# Altium PCB PCB1.PcbDoc (part 3 of 4)
Units mil, origin at the board's own origin, x right, y up, seen from the top; angles counter-clockwise.
Board outline 6000 x 4000 mil, 2 copper layers (Top Layer, Bottom Layer); 7 components, 0 nets, 14 pads, 0 vias.
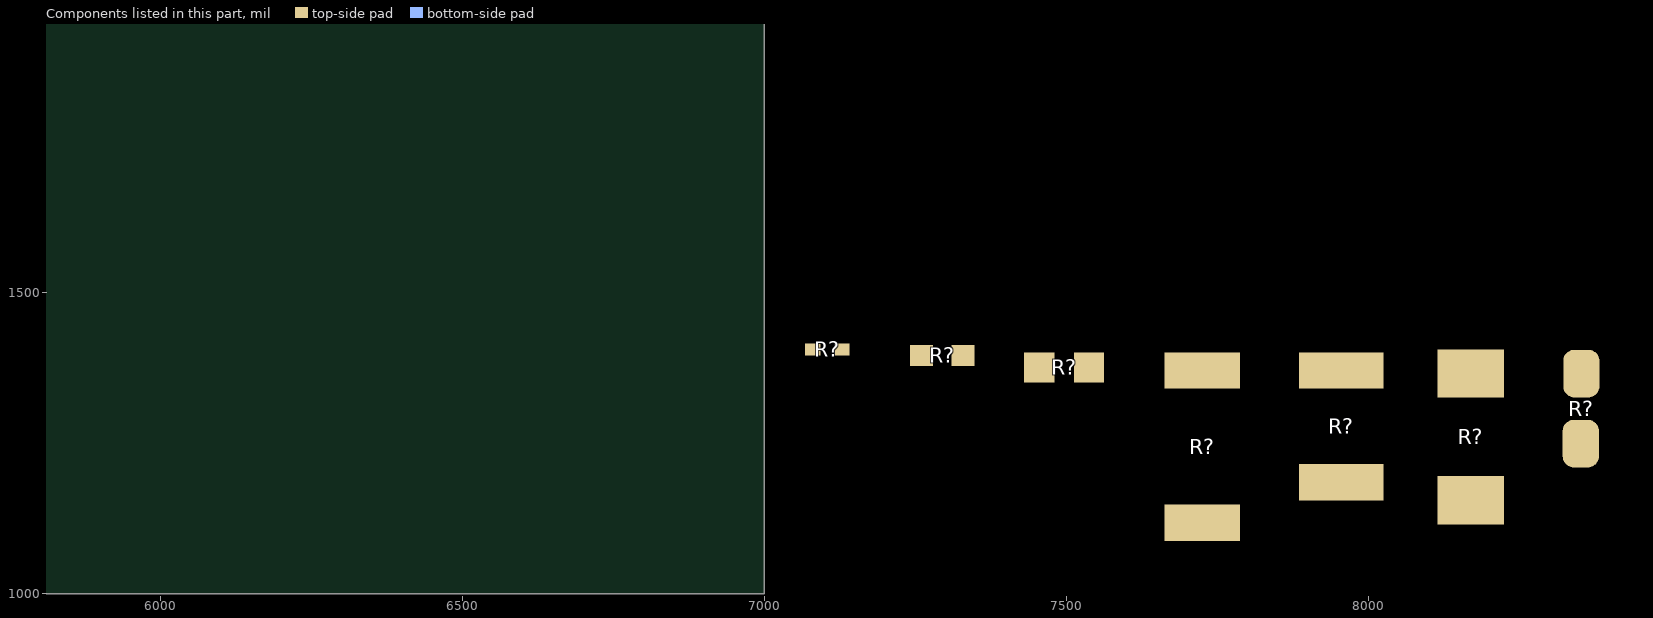
[diagram p3: the components of this part, seen from the top]

## Nets (pads, with @x,y where several pads share a name; then routed paths per layer and width w, separated by ;. In a path a pad name is that pad's centre, name@x,y a point inside that pad or via, vN(x,y) a via of type N, cw(c..) or ccw(c..) an arc to the next point about the centre after c; other vN are vias at no path point) (continued)
copper on no net: (continued)
  Top Layer w1: 6026,1578 6045,1578 ; 6026,1688 6045,1688 ; 6026,1818 6031,1818 ; 6026,1830 6040,1830 ; 6026,1875 6040,1875 ; 6027,1432 6041,1432 ; 6027,1489 6032,1489 ; 6027,1495 6176,1495 ; 6027,1579 6046,1579 ; 6027,1687 6046,1687 ; 6027,1812 6177,1812 ; 6027,1829 6038,1829 ; 6028,1580 6047,1580 ; 6028,1686 6047,1686 ; 6028,1853 6038,1853 ; 6028,1868 6034,1868 ; 6029,1439 6034,1439 ; 6029,1488 6034,1488 ; 6029,1494 6174,1494 ; 6029,1581 6048,1581 ; 6029,1685 6048,1685 ; 6029,1813 6175,1813 ; 6029,1819 6033,1819 ; 6029,1876 6044,1876 ; 6030,1431 6046,1431 ; 6030,1582 6049,1582 ; 6030,1684 6049,1684 ; 6030,1828 6034,1828 ; 6030,1854 6036,1854 ; 6031,1583 6050,1583 ; 6031,1683 6050,1683 ; 6031,1814 6172,1814 ; 6031,1820 6036,1820 ; 6031,1869 6037,1869 ; 6032,1438 6037,1438 ; 6032,1487 6037,1487 ; 6032,1493 6172,1493 ; 6032,1584 6051,1584 ; 6032,1682 6051,1682 ; 6032,1877 6049,1877 ; 6033,1430 6049,1430 ; 6033,1585 6052,1585 ; 6033,1681 6052,1681 ; 6033,1815 6170,1815 ; 6034,1486 6039,1486 ; 6034,1492 6170,1492 ; 6034,1586 6053,1586 ; 6034,1680 6053,1680 ; 6034,1821 6039,1821 ; 6034,1870 6041,1870 ; 6035,1587 6054,1587 ; 6035,1679 6054,1679 ; 6035,1850 6042,1850 ; 6036,1429 6055,1429 ; 6036,1437 6041,1437 ; 6036,1588 6055,1588 ; 6036,1661 6072,1661 ; 6036,1662 6071,1662 ; 6036,1678 6055,1678 ; 6036,1816 6168,1816 ; 6036,1822 6041,1822 ; 6036,1832 6043,1832 ; 6036,1878 6052,1878 ; 6037,1485 6042,1485 ; 6037,1491 6167,1491 ; 6037,1589 6056,1589 ; 6037,1663 6070,1663 ; 6037,1677 6056,1677 ; 6037,1848 6043,1848 ; 6037,1849 6043,1849 ; 6037,1871 6044,1871 ; 6038,1436 6044,1436 ; 6038,1590 6057,1590 ; 6038,1664 6069,1664 ; 6038,1676 6057,1676 ; 6038,1833 6043,1833 ; 6038,1847 6044,1847 ; 6039,1484 6045,1484 ; 6039,1490 6165,1490 ; 6039,1591 6058,1591 ; 6039,1665 6068,1665 ; 6039,1675 6058,1675 ; 6039,1817 6165,1817 ; 6039,1823 6044,1823 ; 6039,1834 6044,1834 ; 6039,1846 6044,1846 ; 6039,1879 6058,1879 ; 6040,1592 6059,1592 ; 6040,1666 6067,1666 ; 6040,1674 6059,1674 ; 6040,1835 6044,1835 ; 6040,1843 6045,1843 ; 6040,1844 6045,1844 ; 6040,1845 6044,1845 ; 6041,1428 6058,1428 ; 6041,1593 6060,1593 ; 6041,1667 6066,1667 ; 6041,1673 6060,1673 ; 6041,1818 6163,1818 ; 6041,1824 6047,1824 ; 6041,1836 6045,1836 ; 6041,1837 6045,1837 ; 6041,1838 6045,1838 ; 6041,1839 6046,1839 ; 6041,1840 6045,1840 ; 6041,1841 6045,1841 ; 6041,1842 6045,1842 ; 6041,1872 6048,1872 ; 6042,1483 6048,1483 ; 6042,1489 6162,1489 ; 6042,1594 6061,1594 ; 6042,1672 6061,1672 ; 6043,1435 6049,1435 ; 6043,1595 6062,1595 ; 6043,1668 6065,1668 ; 6043,1669 6064,1669 ; 6043,1671 6062,1671 ; 6043,1880 6062,1880 ; 6044,1427 6065,1427 ; 6044,1488 6159,1488 ; 6044,1596 6063,1596 ; 6044,1670 6063,1670 ; 6044,1819 6159,1819 ; 6044,1825 6051,1825 ; 6045,1434 6052,1434 ; 6045,1482 6051,1482 ; 6045,1597 6064,1597 ; 6045,1873 6052,1873 ; 6046,1598 6065,1598 ; 6046,1820 6157,1820 ; 6046,1881 6070,1881 ; 6047,1599 6066,1599 ; 6047,1826 6053,1826 ; 6048,1426 6071,1426 ; 6048,1481 6055,1481 ; 6048,1487 6156,1487 ; 6048,1600 6067,1600 ; 6048,1874 6056,1874 ; 6049,1601 6068,1601 ; 6050,1433 6058,1433 ; 6050,1602 6069,1602 ; 6050,1821 6153,1821 ; 6051,1486 6152,1486 ; 6051,1603 6070,1603 ; 6051,1722 6151,1722 ; 6051,1723 6150,1723 ; 6051,1827 6058,1827 ; 6052,1425 6080,1425 ; 6052,1480 6059,1480 ; 6052,1604 6071,1604 ; 6052,1724 6149,1724 ; 6052,1882 6075,1882 ; 6053,1605 6072,1605 ; 6053,1721 6150,1721 ; 6053,1725 6148,1725 ; 6053,1822 6150,1822 ; 6054,1432 6062,1432 ; 6054,1485 6149,1485 ; 6054,1606 6073,1606 ; 6054,1720 6149,1720 ; 6054,1726 6147,1726 ; 6054,1828 6062,1828 ; 6054,1875 6063,1875 ; 6055,1445 6058,1445 ; 6055,1446 6058,1446 ; 6055,1447 6058,1447 ; 6055,1448 6058,1448 ; 6055,1449 6058,1449 ; 6055,1450 6059,1450 ; 6055,1479 6062,1479 ; 6055,1607 6074,1607 ; 6055,1719 6148,1719 ; 6055,1727 6146,1727 ; 6056,1451 6059,1451 ; 6056,1452 6059,1452 ; 6056,1453 6059,1453 ; 6056,1608 6075,1608 ; 6056,1718 6147,1718 ; 6056,1728 6145,1728 ; 6056,1855 6061,1855 ; 6056,1856 6061,1856 ; 6056,1857 6060,1857 ; 6056,1858 6060,1858 ; 6056,1859 6060,1859 ; 6056,1860 6060,1860 ; 6056,1861 6060,1861 ; 6056,1883 6091,1883 ; 6057,1454 6059,1454 ; 6057,1455 6059,1455 ; 6057,1609 6076,1609 ; 6057,1717 6146,1717 ; 6057,1729 6144,1729 ; 6057,1823 6147,1823 ; 6057,1849 6062,1849 ; 6057,1850 6062,1850 ; 6057,1851 6061,1851 ; 6057,1852 6061,1852 ; 6057,1853 6061,1853 ; 6057,1854 6061,1854 ; 6057,1876 6067,1876 ; 6058,1424 6146,1424 ; 6058,1610 6077,1610 ; 6058,1716 6145,1716 ; 6058,1730 6143,1730 ; 6058,1829 6066,1829 ; 6058,1845 6062,1845 ; 6058,1846 6062,1846 ; 6058,1847 6062,1847 ; 6058,1848 6062,1848 ; 6059,1484 6145,1484 ; 6059,1611 6078,1611 ; 6059,1653 6080,1653 ; 6059,1715 6144,1715 ; 6059,1731 6142,1731 ; 6059,1841 6066,1841 ; 6059,1842 6064,1842 ; 6059,1843 6064,1843 ; 6059,1844 6063,1844 ; 6060,1431 6070,1431 ; 6060,1478 6068,1478 ; 6060,1612 6079,1612 ; 6060,1652 6081,1652 ; 6060,1714 6143,1714 ; 6060,1732 6141,1732 ; 6060,1840 6076,1840 ; 6061,1613 6080,1613 ; 6061,1651 6082,1651 ; 6061,1713 6142,1713 ; 6061,1733 6140,1733 ; 6061,1824 6143,1824 ; 6061,1839 6075,1839 ; 6062,1483 6142,1483 ; 6062,1574 6143,1574 ; 6062,1614 6081,1614 ; 6062,1650 6083,1650 ; 6062,1712 6141,1712 ; 6062,1734 6139,1734 ; 6062,1838 6073,1838 ; 6062,1884 6142,1884 ; 6063,1423 6140,1423 ; 6063,1454 6066,1454 ; 6063,1455 6066,1455 ; 6063,1477 6073,1477 ; 6063,1573 6142,1573 ; 6063,1575 6144,1575 ; 6063,1615 6082,1615 ; 6063,1649 6084,1649 ; 6063,1711 6140,1711 ; 6063,1735 6138,1735 ; 6063,1830 6072,1830 ; 6064,1443 6070,1443 ; 6064,1444 6075,1444 ; 6064,1453 6065,1453 ; 6064,1456 6068,1456 ; 6064,1572 6141,1572 ; 6064,1576 6145,1576 ; 6064,1616 6083,1616 ; 6064,1648 6085,1648 ; 6064,1710 6139,1710 ; 6064,1736 6137,1736 ; 6064,1877 6077,1877 ; 6065,1449 6068,1449 ; 6065,1450 6067,1450 ; 6065,1451 6067,1451 ; 6065,1452 6067,1452 ; 6065,1457 6069,1457 ; 6065,1466 6076,1466 ; 6065,1467 6069,1467 ; 6065,1571 6140,1571 ; 6065,1577 6146,1577 ; 6065,1617 6084,1617 ; 6065,1647 6086,1647 ; 6065,1709 6138,1709 ; 6065,1737 6136,1737 ; 6065,1825 6138,1825 ; 6066,1430 6076,1430 ; 6066,1437 6068,1437 ; 6066,1448 6074,1448 ; 6066,1458 6069,1458 ; 6066,1465 6081,1465 ; 6066,1570 6139,1570 ; 6066,1578 6147,1578 ; 6066,1618 6085,1618 ; 6066,1646 6087,1646 ; 6066,1708 6137,1708 ; 6066,1738 6135,1738 ; 6066,1831 6078,1831 ; 6067,1436 6068,1436 ; 6067,1438 6068,1438 ; 6067,1439 6069,1439 ; 6067,1440 6069,1440 ; 6067,1441 6069,1441 ; 6067,1442 6070,1442 ; 6067,1447 6073,1447 ; 6067,1459 6070,1459 ; 6067,1482 6136,1482 ; 6067,1569 6138,1569 ; 6067,1579 6148,1579 ; 6067,1619 6086,1619 ; 6067,1645 6088,1645 ; 6067,1707 6136,1707 ; 6067,1739 6134,1739 ; 6067,1885 6136,1885 ; 6068,1446 6073,1446 ; 6068,1460 6071,1460 ; 6068,1568 6137,1568 ; 6068,1580 6149,1580 ; 6068,1620 6087,1620 ; 6068,1644 6089,1644 ; 6068,1706 6135,1706 ; 6068,1740 6133,1740 ; 6069,1445 6073,1445 ; 6069,1449 6074,1449 ; 6069,1461 6072,1461 ; 6069,1464 6080,1464 ; 6069,1476 6081,1476 ; 6069,1567 6136,1567 ; 6069,1581 6150,1581 ; 6069,1621 6088,1621 ; 6069,1643 6090,1643 ; 6069,1705 6134,1705 ; 6069,1741 6132,1741 ; 6069,1878 6085,1878 ; 6070,1422 6134,1422 ; 6070,1450 6073,1450 ; 6070,1462 6072,1462 ; 6070,1463 6073,1463 ; 6070,1566 6135,1566 ; 6070,1582 6151,1582 ; 6070,1622 6089,1622 ; 6070,1642 6091,1642 ; 6070,1704 6133,1704 ; 6070,1742 6131,1742 ; 6070,1841 6077,1841 ; 6071,1451 6073,1451 ; 6071,1467 6075,1467 ; 6071,1565 6134,1565 ; 6071,1583 6150,1583 ; 6071,1623 6110,1623 ; 6071,1641 6092,1641 ; 6071,1703 6132,1703 ; 6071,1743 6130,1743 ; 6071,1826 6132,1826 ; 6071,1862 6076,1862 ; 6071,1863 6075,1863 ; 6072,1429 6089,1429 ; 6072,1452 6074,1452 ; 6072,1453 6074,1453 ; 6072,1454 6076,1454 ; 6072,1468 6075,1468 ; 6072,1481 6132,1481 ; 6072,1564 6133,1564 ; 6072,1584 6149,1584 ; 6072,1624 6109,1624 ; 6072,1640 6093,1640 ; 6072,1702 6131,1702 ; 6072,1744 6129,1744 ; 6072,1842 6077,1842 ; 6072,1855 6077,1855 ; 6072,1856 6077,1856 ; 6072,1857 6077,1857 ; 6072,1858 6076,1858 ; 6072,1859 6076,1859 ; 6072,1860 6076,1860 ; 6072,1861 6076,1861 ; 6072,1864 6075,1864 ; 6073,1443 6075,1443 ; 6073,1455 6088,1455 ; 6073,1469 6075,1469 ; 6073,1563 6132,1563 ; 6073,1585 6148,1585 ; 6073,1625 6108,1625 ; 6073,1639 6094,1639 ; 6073,1701 6130,1701 ; 6073,1745 6128,1745 ; 6073,1832 6089,1832 ; 6073,1843 6078,1843 ; 6073,1850 6078,1850 ; 6073,1851 6077,1851 ; 6073,1852 6077,1852 ; 6073,1853 6077,1853 ; 6073,1854 6077,1854 ; 6074,1475 6092,1475 ; 6074,1562 6131,1562 ; 6074,1586 6147,1586 ; 6074,1626 6107,1626 ; 6074,1638 6095,1638 ; 6074,1700 6129,1700 ; 6074,1746 6127,1746 ; 6074,1844 6078,1844 ; 6074,1845 6078,1845 ; 6074,1846 6078,1846 ; 6074,1847 6078,1847 ; 6074,1848 6078,1848 ; 6074,1849 6078,1849 ; 6075,1456 6084,1456 ; 6075,1561 6130,1561 ; 6075,1587 6146,1587 ; 6075,1627 6106,1627 ; 6075,1637 6096,1637 ; 6075,1699 6128,1699 ; 6075,1747 6126,1747 ; 6075,1886 6128,1886 ; 6076,1436 6082,1436 ; 6076,1437 6078,1437 ; 6076,1560 6129,1560 ; 6076,1588 6145,1588 ; 6076,1628 6105,1628 ; 6076,1636 6097,1636 ; 6076,1698 6127,1698 ; 6076,1748 6125,1748 ; 6076,1827 6128,1827 ; 6077,1435 6081,1435 ; 6077,1559 6127,1559 ; 6077,1589 6144,1589 ; 6077,1629 6104,1629 ; 6077,1635 6098,1635 ; 6077,1697 6126,1697 ; 6077,1749 6124,1749 ; 6078,1434 6079,1434 ; 6078,1558 6127,1558 ; 6078,1590 6143,1590 ; 6078,1630 6103,1630 ; 6078,1634 6099,1634 ; 6078,1696 6125,1696 ; 6078,1750 6123,1750 ; 6078,1879 6125,1879 ; 6079,1421 6124,1421 ; 6079,1466 6081,1466 ; 6079,1480 6124,1480 ; 6079,1557 6126,1557 ; 6079,1591 6142,1591 ; 6079,1631 6102,1631 ; 6079,1633 6100,1633 ; 6079,1695 6124,1695 ; 6079,1751 6122,1751 ; 6079,1833 6124,1833 ; 6080,1437 6083,1437 ; 6080,1556 6125,1556 ; 6080,1592 6141,1592 ; 6080,1632 6101,1632 ; 6080,1694 6123,1694 ; 6080,1752 6121,1752 ; 6081,1438 6083,1438 ; 6081,1439 6084,1439 ; 6081,1555 6124,1555 ; 6081,1593 6140,1593 ; 6081,1693 6122,1693 ; 6081,1753 6120,1753 ; 6082,1440 6084,1440 ; 6082,1441 6085,1441 ; 6082,1454 6089,1454 ; 6082,1554 6123,1554 ; 6082,1594 6139,1594 ; 6082,1692 6121,1692 ; 6082,1754 6119,1754 ; 6083,1442 6086,1442 ; 6083,1443 6086,1443 ; 6083,1474 6120,1474 ; 6083,1553 6122,1553 ; 6083,1595 6138,1595 ; 6083,1691 6120,1691 ; 6083,1755 6118,1755 ; 6084,1444 6087,1444 ; 6084,1445 6087,1445 ; 6084,1552 6121,1552 ; 6084,1596 6137,1596 ; 6084,1690 6119,1690 ; 6084,1756 6117,1756 ; 6085,1446 6087,1446 ; 6085,1447 6088,1447 ; 6085,1448 6088,1448 ; 6085,1453 6089,1453 ; 6085,1551 6120,1551 ; 6085,1597 6136,1597 ; 6085,1689 6118,1689 ; 6085,1757 6116,1757 ; 6086,1428 6118,1428 ; 6086,1449 6089,1449 ; 6086,1450 6089,1450 ; 6086,1451 6089,1451 ; 6086,1452 6089,1452 ; 6086,1550 6119,1550 ; 6086,1598 6135,1598 ; 6086,1688 6117,1688 ; 6086,1758 6115,1758 ; 6086,1828 6118,1828 ; 6087,1549 6118,1549 ; 6087,1599 6134,1599 ; 6087,1687 6116,1687 ; 6087,1759 6114,1759 ; 6088,1479 6115,1479 ; 6088,1548 6117,1548 ; 6088,1600 6133,1600 ; 6088,1686 6115,1686 ; 6088,1760 6112,1760 ; 6089,1547 6116,1547 ; 6089,1601 6132,1601 ; 6089,1685 6114,1685 ; 6089,1761 6111,1761 ; 6090,1546 6115,1546 ; 6090,1602 6131,1602 ; 6090,1684 6113,1684 ; 6090,1863 6110,1863 ; 6090,1864 6110,1864 ; 6090,1865 6110,1865 ; 6091,1603 6130,1603 ; 6091,1683 6112,1683 ; 6091,1762 6109,1762 ; 6091,1880 6110,1880 ; 6092,1420 6112,1420 ; 6092,1545 6113,1545 ; 6092,1604 6129,1604 ; 6092,1622 6111,1622 ; 6092,1682 6111,1682 ; 6092,1834 6111,1834 ; 6093,1544 6112,1544 ; 6093,1605 6128,1605 ; 6093,1621 6112,1621 ; 6093,1681 6111,1681 ; 6093,1763 6107,1763 ; 6094,1606 6127,1606 ; 6094,1620 6113,1620 ; 6094,1680 6112,1680 ; 6095,1543 6110,1543 ; 6095,1607 6126,1607 ; 6095,1619 6114,1619 ; 6095,1679 6113,1679 ; 6095,1764 6104,1764 ; 6096,1608 6125,1608 ; 6096,1618 6115,1618 ; 6096,1678 6114,1678 ; 6097,1609 6124,1609 ; 6097,1617 6116,1617 ; 6097,1677 6115,1677 ; 6097,1862 6103,1862 ; 6098,1542 6108,1542 ; 6098,1610 6123,1610 ; 6098,1616 6117,1616 ; 6098,1676 6116,1676 ; 6098,1841 6102,1841 ; 6098,1842 6102,1842 ; 6098,1843 6102,1843 ; 6098,1844 6102,1844 ; 6098,1845 6102,1845 ; 6098,1846 6102,1846 ; 6098,1847 6102,1847 ; 6098,1848 6102,1848 ; 6098,1849 6102,1849 ; 6098,1850 6102,1850 ; 6098,1851 6102,1851 ; 6098,1852 6102,1852 ; 6098,1853 6102,1853 ; 6098,1854 6102,1854 ; 6098,1855 6102,1855 ; 6098,1856 6102,1856 ; 6098,1857 6102,1857 ; 6098,1858 6102,1858 ; 6098,1859 6102,1859 ; 6098,1860 6102,1860 ; 6098,1861 6102,1861 ; 6099,1611 6122,1611 ; 6099,1615 6118,1615 ; 6099,1675 6117,1675 ; 6100,1612 6121,1612 ; 6100,1613 6120,1613 ; 6100,1614 6119,1614 ; 6100,1674 6118,1674 ; 6101,1673 6119,1673 ; 6102,1672 6120,1672 ; 6103,1671 6140,1671 ; 6103,1803 6193,1803 ; 6104,1670 6139,1670 ; 6105,1669 6138,1669 ; 6106,1668 6137,1668 ; 6107,1667 6136,1667 ; 6108,1503 6191,1503 ; 6108,1666 6135,1666 ; 6108,1802 6195,1802 ; 6109,1665 6134,1665 ; 6110,1664 6133,1664 ; 6111,1663 6132,1663 ; 6111,1801 6197,1801 ; 6112,1475 6129,1475 ; 6112,1504 6193,1504 ; 6112,1662 6132,1662 ; 6112,1883 6148,1883 ; 6113,1661 6132,1661 ; 6113,1800 6198,1800 ; 6114,1429 6132,1429 ; 6114,1505 6195,1505 ; 6114,1659 6134,1659 ; 6114,1660 6132,1660 ; 6114,1832 6130,1832 ; 6115,1448 6120,1448 ; 6115,1449 6122,1449 ; 6115,1799 6200,1799 ; 6116,1447 6119,1447 ; 6116,1506 6196,1506 ; 6116,1658 6135,1658 ; 6117,1507 6198,1507 ; 6117,1657 6136,1657 ; 6117,1798 6201,1798 ; 6118,1450 6128,1450 ; 6118,1508 6199,1508 ; 6118,1656 6137,1656 ; 6118,1878 6134,1878 ; 6119,1655 6138,1655 ; 6119,1797 6203,1797 ; 6120,1451 6128,1451 ; 6120,1509 6201,1509 ; 6120,1654 6139,1654 ; 6120,1796 6204,1796 ; 6121,1439 6123,1439 ; 6121,1440 6124,1440 ; 6121,1441 6125,1441 ; 6121,1510 6202,1510 ; 6121,1653 6140,1653 ; 6121,1795 6205,1795 ; 6121,1840 6125,1840 ; 6121,1841 6125,1841 ; 6121,1842 6125,1842 ; 6121,1843 6125,1843 ; 6122,1442 6126,1442 ; 6122,1476 6134,1476 ; 6122,1511 6204,1511 ; 6122,1652 6140,1652 ; 6122,1672 6201,1672 ; 6122,1794 6207,1794 ; 6122,1844 6126,1844 ; 6122,1845 6126,1845 ; 6122,1846 6126,1846 ; 6122,1847 6126,1847 ; 6122,1848 6126,1848 ; 6122,1849 6127,1849 ; 6122,1850 6127,1850 ; 6122,1851 6143,1851 ; 6123,1425 6151,1425 ; 6123,1443 6126,1443 ; 6123,1444 6127,1444 ; 6123,1452 6129,1452 ; 6123,1512 6205,1512 ; 6123,1651 6142,1651 ; 6123,1673 6200,1673 ; 6123,1852 6143,1852 ; 6123,1853 6133,1853 ; 6123,1854 6129,1854 ; 6123,1855 6127,1855 ; 6123,1856 6127,1856 ; 6124,1445 6127,1445 ; 6124,1446 6128,1446 ; 6124,1466 6127,1466 ; 6124,1467 6127,1467 ; 6124,1513 6206,1513 ; 6124,1650 6143,1650 ; 6124,1674 6199,1674 ; 6124,1793 6208,1793 ; 6124,1857 6128,1857 ; 6124,1858 6128,1858 ; 6124,1859 6128,1859 ; 6124,1860 6128,1860 ; 6124,1861 6128,1861 ; 6124,1862 6129,1862 ; 6124,1863 6129,1863 ; 6125,1447 6128,1447 ; 6125,1453 6131,1453 ; 6125,1461 6128,1461 ; 6125,1462 6128,1462 ; 6125,1463 6128,1463 ; 6125,1464 6128,1464 ; 6125,1465 6128,1465 ; 6125,1514 6208,1514 ; 6125,1649 6144,1649 ; 6125,1675 6198,1675 ; 6125,1792 6209,1792 ; 6125,1831 6137,1831 ; 6125,1864 6129,1864 ; 6126,1448 6128,1448 ; 6126,1449 6128,1449 ; 6126,1454 6136,1454 ; 6126,1455 6139,1455 ; 6126,1456 6129,1456 ; 6126,1457 6129,1457 ; 6126,1458 6128,1458 ; 6126,1459 6128,1459 ; 6126,1460 6128,1460 ; 6126,1515 6209,1515 ; 6126,1648 6145,1648 ; 6126,1676 6197,1676 ; 6126,1791 6211,1791 ; 6126,1877 6140,1877 ; 6127,1430 6137,1430 ; 6127,1516 6210,1516 ; 6127,1647 6146,1647 ; 6127,1677 6196,1677 ; 6127,1790 6212,1790 ; 6128,1517 6211,1517 ; 6128,1646 6147,1646 ; 6128,1678 6195,1678 ; 6128,1789 6213,1789 ; 6128,1882 6152,1882 ; 6129,1518 6213,1518 ; 6129,1645 6148,1645 ; 6129,1679 6194,1679 ; 6129,1787 6215,1787 ; 6129,1788 6214,1788 ; 6130,1519 6214,1519 ; 6130,1644 6149,1644 ; 6130,1680 6193,1680 ; 6131,1477 6140,1477 ; 6131,1520 6215,1520 ; 6131,1643 6150,1643 ; 6131,1681 6192,1681 ; 6131,1785 6218,1785 ; 6131,1786 6217,1786 ; 6131,1830 6141,1830 ; 6131,1850 6143,1850 ; 6132,1521 6216,1521 ; 6132,1642 6151,1642 ; 6132,1682 6191,1682 ; 6133,1426 6155,1426 ; 6133,1456 6140,1456 ; 6133,1522 6217,1522 ; 6133,1641 6152,1641 ; 6133,1683 6190,1683 ; 6133,1784 6219,1784 ; 6133,1881 6157,1881 ; 6134,1431 6144,1431 ; 6134,1523 6218,1523 ; 6134,1640 6153,1640 ; 6134,1684 6189,1684 ; 6134,1783 6220,1783 ; 6135,1478 6143,1478 ; 6135,1524 6220,1524 ; 6135,1639 6153,1639 ; 6135,1685 6188,1685 ; 6135,1782 6221,1782 ; 6136,1446 6140,1446 ; 6136,1447 6138,1447 ; 6136,1457 6140,1457 ; 6136,1525 6221,1525 ; 6136,1638 6155,1638 ; 6136,1686 6187,1686 ; 6136,1781 6222,1781 ; 6136,1876 6146,1876 ; 6137,1445 6142,1445 ; 6137,1526 6222,1526 ; 6137,1637 6156,1637 ; 6137,1687 6186,1687 ; 6137,1780 6223,1780 ; 6137,1829 6145,1829 ; 6137,1838 6141,1838 ; 6137,1839 6141,1839 ; 6137,1840 6141,1840 ; 6137,1841 6141,1841 ; 6137,1842 6142,1842 ; 6137,1843 6142,1843 ; 6137,1844 6142,1844 ; 6137,1849 6143,1849 ; 6138,1427 6160,1427 ; 6138,1444 6144,1444 ; 6138,1458 6140,1458 ; 6138,1527 6223,1527 ; 6138,1636 6157,1636 ; 6138,1688 6185,1688 ; 6138,1779 6224,1779 ; 6138,1837 6140,1837 ; 6138,1845 6142,1845 ; 6138,1846 6142,1846 ; 6138,1847 6142,1847 ; 6138,1848 6142,1848 ; 6139,1443 6145,1443 ; 6139,1528 6224,1528 ; 6139,1635 6158,1635 ; 6139,1689 6184,1689 ; 6139,1778 6225,1778 ; 6139,1853 6143,1853 ; 6139,1854 6143,1854 ; 6139,1855 6143,1855 ; 6139,1856 6144,1856 ; 6140,1442 6146,1442 ; 6140,1529 6225,1529 ; 6140,1634 6158,1634 ; 6140,1690 6183,1690 ; 6140,1777 6226,1777 ; 6140,1857 6144,1857 ; 6140,1858 6144,1858 ; 6140,1859 6144,1859 ; 6140,1860 6144,1860 ; 6140,1861 6145,1861 ; 6140,1875 6150,1875 ; 6141,1441 6147,1441 ; 6141,1479 6149,1479 ; 6141,1530 6226,1530 ; 6141,1633 6160,1633 ; 6141,1691 6182,1691 ; 6141,1776 6227,1776 ; 6141,1862 6144,1862 ; 6142,1432 6150,1432 ; 6142,1440 6147,1440 ; 6142,1531 6227,1531 ; 6142,1632 6161,1632 ; 6142,1692 6181,1692 ; 6142,1775 6228,1775 ; 6142,1828 6149,1828 ; 6142,1880 6160,1880 ; 6143,1439 6146,1439 ; 6143,1532 6228,1532 ; 6143,1631 6162,1631 ; 6143,1670 6203,1670 ; 6143,1671 6202,1671 ; 6143,1693 6180,1693 ; 6143,1774 6229,1774 ; 6144,1533 6229,1533 ; 6144,1630 6163,1630 ; 6144,1669 6204,1669 ; 6144,1694 6179,1694 ; 6144,1773 6230,1773 ; 6145,1428 6163,1428 ; 6145,1433 6153,1433 ; 6145,1480 6151,1480 ; 6145,1534 6230,1534 ; 6145,1629 6164,1629 ; 6145,1668 6205,1668 ; 6145,1695 6178,1695 ; 6145,1772 6231,1772 ; 6145,1827 6153,1827 ; 6145,1879 6164,1879 ; 6146,1535 6231,1535 ; 6146,1628 6165,1628 ; 6146,1667 6206,1667 ; 6146,1696 6177,1696 ; 6146,1771 6232,1771 ; 6147,1536 6232,1536 ; 6147,1627 6166,1627 ; 6147,1666 6206,1666 ; 6147,1697 6176,1697 ; 6147,1770 6233,1770 ; 6147,1874 6155,1874 ; 6148,1537 6233,1537 ; 6148,1626 6167,1626 ; 6148,1665 6207,1665 ; 6148,1698 6175,1698 ; 6148,1769 6234,1769 ; 6149,1429 6167,1429 ; 6149,1481 6155,1481 ; 6149,1538 6233,1538 ; 6149,1625 6167,1625 ; 6149,1664 6208,1664 ; 6149,1699 6174,1699 ; 6149,1768 6235,1768 ; 6150,1539 6234,1539 ; 6150,1624 6169,1624 ; 6150,1663 6208,1663 ; 6150,1700 6173,1700 ; 6150,1767 6235,1767 ; 6150,1826 6156,1826 ; 6151,1434 6158,1434 ; 6151,1540 6235,1540 ; 6151,1623 6170,1623 ; 6151,1662 6209,1662 ; 6151,1701 6172,1701 ; 6151,1766 6236,1766 ; 6151,1873 6158,1873 ; 6151,1878 6168,1878 ; 6152,1482 6158,1482 ; 6152,1541 6236,1541 ; 6152,1622 6171,1622 ; 6152,1661 6210,1661 ; 6152,1702 6172,1702 ; 6152,1765 6237,1765 ; 6153,1542 6237,1542 ; 6153,1621 6172,1621 ; 6153,1660 6210,1660 ; 6153,1703 6172,1703 ; 6153,1764 6238,1764 ; 6153,1825 6159,1825 ; 6154,1435 6161,1435 ; 6154,1543 6238,1543 ; 6154,1620 6173,1620 ; 6154,1659 6211,1659 ; 6154,1704 6173,1704 ; 6154,1763 6239,1763 ; 6155,1430 6170,1430 ; 6155,1483 6161,1483 ; 6155,1544 6238,1544 ; 6155,1619 6174,1619 ; 6155,1705 6174,1705 ; 6155,1762 6240,1762 ; 6155,1877 6171,1877 ; 6156,1545 6239,1545 ; 6156,1618 6175,1618 ; 6156,1657 6212,1657 ; 6156,1658 6211,1658 ; 6156,1706 6175,1706 ; 6156,1761 6240,1761 ; 6156,1824 6162,1824 ; 6156,1872 6163,1872 ; 6157,1431 6174,1431 ; 6157,1546 6240,1546 ; 6157,1617 6176,1617 ; 6157,1656 6212,1656 ; 6157,1707 6176,1707 ; 6157,1760 6241,1760 ; 6158,1484 6164,1484 ; 6158,1547 6241,1547 ; 6158,1616 6177,1616 ; 6158,1655 6212,1655 ; 6158,1708 6177,1708 ; 6158,1759 6242,1759 ; 6159,1436 6165,1436 ; 6159,1548 6242,1548 ; 6159,1615 6177,1615 ; 6159,1654 6212,1654 ; 6159,1709 6178,1709 ; 6159,1758 6242,1758 ; 6159,1823 6164,1823 ; 6159,1871 6166,1871 ; 6159,1876 6174,1876 ; 6160,1549 6242,1549 ; 6160,1614 6178,1614 ; 6160,1653 6213,1653 ; 6160,1710 6179,1710 ; 6160,1757 6243,1757 ; 6161,1485 6167,1485 ; 6161,1550 6243,1550 ; 6161,1613 6180,1613 ; 6161,1652 6213,1652 ; 6161,1711 6180,1711 ; 6161,1756 6244,1756 ; 6162,1432 6177,1432 ; 6162,1437 6168,1437 ; 6162,1551 6244,1551 ; 6162,1612 6180,1612 ; 6162,1651 6213,1651 ; 6162,1712 6181,1712 ; 6162,1755 6245,1755 ; 6162,1822 6168,1822 ; 6163,1552 6244,1552 ; 6163,1611 6182,1611 ; 6163,1650 6213,1650 ; 6163,1713 6182,1713 ; 6163,1754 6245,1754 ; 6163,1870 6169,1870 ; 6163,1875 6177,1875 ; 6164,1486 6169,1486 ; 6164,1553 6245,1553 ; 6164,1610 6183,1610 ; 6164,1649 6213,1649 ; 6164,1714 6183,1714 ; 6164,1753 6246,1753 ; 6165,1433 6179,1433 ; 6165,1554 6246,1554 ; 6165,1609 6184,1609 ; 6165,1648 6213,1648 ; 6165,1715 6184,1715 ; 6165,1752 6247,1752 ; 6165,1821 6170,1821 ; 6166,1438 6172,1438 ; 6166,1487 6171,1487 ; 6166,1555 6247,1555 ; 6166,1608 6185,1608 ; 6166,1647 6212,1647 ; 6166,1716 6185,1716 ; 6166,1751 6248,1751 ; 6166,1874 6180,1874 ; 6167,1556 6247,1556 ; 6167,1607 6186,1607 ; 6167,1646 6212,1646 ; 6167,1717 6186,1717 ; 6167,1750 6248,1750 ; 6167,1869 6173,1869 ; 6168,1557 6248,1557 ; 6168,1606 6187,1606 ; 6168,1645 6212,1645 ; 6168,1718 6187,1718 ; 6168,1749 6249,1749 ; 6168,1820 6172,1820 ; 6169,1434 6182,1434 ; 6169,1439 6174,1439 ; 6169,1488 6174,1488 ; 6169,1558 6249,1558 ; 6169,1605 6187,1605 ; 6169,1644 6211,1644 ; 6169,1719 6188,1719 ; 6169,1748 6249,1748 ; 6169,1868 6175,1868 ; 6170,1559 6249,1559 ; 6170,1604 6189,1604 ; 6170,1643 6211,1643 ; 6170,1720 6189,1720 ; 6170,1747 6250,1747 ; 6170,1819 6175,1819 ; 6170,1873 6183,1873 ; 6171,1489 6176,1489 ; 6171,1560 6250,1560 ; 6171,1603 6190,1603 ; 6171,1721 6190,1721 ; 6171,1746 6251,1746 ; 6172,1435 6184,1435 ; 6172,1440 6177,1440 ; 6172,1561 6250,1561 ; 6172,1602 6191,1602 ; 6172,1641 6209,1641 ; 6172,1642 6210,1642 ; 6172,1722 6191,1722 ; 6172,1745 6251,1745 ; 6172,1818 6177,1818 ; 6172,1872 6186,1872 ; 6173,1459 6176,1459 ; 6173,1460 6176,1460 ; 6173,1461 6176,1461 ; 6173,1462 6176,1462 ; 6173,1562 6251,1562 ; 6173,1601 6192,1601 ; 6173,1640 6208,1640 ; 6173,1723 6192,1723 ; 6173,1744 6252,1744 ; 6173,1867 6179,1867 ; 6174,1457 6176,1457 ; 6174,1458 6176,1458 ; 6174,1463 6175,1463 ; 6174,1490 6178,1490 ; 6174,1563 6252,1563 ; 6174,1600 6193,1600 ; 6174,1639 6207,1639 ; 6174,1724 6262,1724 ; 6174,1743 6252,1743 ; 6174,1817 6179,1817 ; 6175,1436 6187,1436 ; 6175,1441 6180,1441 ; 6175,1564 6252,1564 ; 6175,1599 6194,1599 ; 6175,1638 6206,1638 ; 6175,1725 6262,1725 ; 6175,1742 6253,1742 ; 6175,1866 6181,1866 ; 6176,1491 6180,1491 ; 6176,1565 6253,1565 ; 6176,1598 6195,1598 ; 6176,1637 6205,1637 ; 6176,1726 6261,1726 ; 6176,1741 6254,1741 ; 6176,1871 6188,1871 ; 6177,1473 6180,1473 ; 6177,1474 6179,1474 ; 6177,1566 6253,1566 ; 6177,1597 6196,1597 ; 6177,1636 6204,1636 ; 6177,1727 6261,1727 ; 6177,1740 6254,1740 ; 6177,1816 6181,1816 ; 6178,1437 6190,1437 ; 6178,1442 6183,1442 ; 6178,1464 6180,1464 ; 6178,1465 6182,1465 ; 6178,1470 6180,1470 ; 6178,1471 6180,1471 ; 6178,1472 6180,1472 ; 6178,1492 6182,1492 ; 6178,1567 6254,1567 ; 6178,1596 6197,1596 ; 6178,1635 6203,1635 ; 6178,1728 6260,1728 ; 6178,1739 6255,1739 ; 6178,1870 6191,1870 ; 6179,1469 6180,1469 ; 6179,1568 6255,1568 ; 6179,1595 6198,1595 ; 6179,1634 6202,1634 ; 6179,1729 6260,1729 ; 6179,1738 6255,1738 ; 6179,1815 6183,1815 ; 6179,1865 6184,1865 ; 6180,1438 6192,1438 ; 6180,1466 6183,1466 ; 6180,1479 6183,1479 ; 6180,1480 6185,1480 ; 6180,1481 6181,1481 ; 6180,1493 6185,1493 ; 6180,1569 6255,1569 ; 6180,1594 6199,1594 ; 6180,1633 6201,1633 ; 6180,1730 6260,1730 ; 6180,1737 6256,1737 ; 6181,1443 6185,1443 ; 6181,1467 6184,1467 ; 6181,1476 6183,1476 ; 6181,1477 6183,1477 ; 6181,1478 6183,1478 ; 6181,1570 6256,1570 ; 6181,1593 6200,1593 ; 6181,1632 6200,1632 ; 6181,1731 6259,1731 ; 6181,1736 6256,1736 ; 6181,1814 6185,1814 ; 6181,1864 6186,1864 ; 6182,1473 6185,1473 ; 6182,1474 6184,1474 ; 6182,1475 6184,1475 ; 6182,1494 6186,1494 ; 6182,1571 6256,1571 ; 6182,1592 6201,1592 ; 6182,1631 6199,1631 ; 6182,1732 6258,1732 ; 6182,1735 6257,1735 ; 6182,1869 6193,1869 ; 6183,1444 6187,1444 ; 6183,1468 6185,1468 ; 6183,1469 6186,1469 ; 6183,1471 6189,1471 ; 6183,1472 6185,1472 ; 6183,1481 6193,1481 ; 6183,1486 6186,1486 ; 6183,1487 6185,1487 ; 6183,1572 6257,1572 ; 6183,1591 6201,1591 ; 6183,1630 6198,1630 ; 6183,1733 6258,1733 ; 6183,1734 6257,1734 ; 6183,1813 6187,1813 ; 6184,1439 6195,1439 ; 6184,1470 6188,1470 ; 6184,1482 6187,1482 ; 6184,1485 6186,1485 ; 6184,1495 6188,1495 ; 6184,1573 6257,1573 ; 6184,1590 6265,1590 ; 6184,1629 6197,1629 ; 6184,1863 6189,1863 ; 6184,1868 6195,1868 ; 6185,1440 6197,1440 ; 6185,1462 6187,1462 ; 6185,1463 6188,1463 ; 6185,1483 6186,1483 ; 6185,1484 6186,1484 ; 6185,1574 6258,1574 ; 6185,1589 6264,1589 ; 6185,1628 6196,1628 ; 6185,1812 6189,1812 ; 6186,1445 6190,1445 ; 6186,1464 6189,1464 ; 6186,1479 6188,1479 ; 6186,1480 6189,1480 ; 6186,1496 6190,1496 ; 6186,1575 6258,1575 ; 6186,1587 6264,1587 ; 6186,1588 6264,1588 ; 6186,1627 6195,1627 ; 6186,1823 6190,1823 ; 6186,1824 6190,1824 ; 6186,1825 6190,1825 ; 6186,1826 6190,1826 ; 6186,1827 6191,1827 ; 6186,1862 6191,1862 ; 6187,1454 6195,1454 ; 6187,1455 6191,1455 ; 6187,1456 6190,1456 ; 6187,1465 6193,1465 ; 6187,1472 6191,1472 ; 6187,1475 6189,1475 ; 6187,1476 6189,1476 ; 6187,1477 6188,1477 ; 6187,1576 6259,1576 ; 6187,1626 6194,1626 ; 6187,1811 6191,1811 ; 6187,1821 6192,1821 ; 6187,1822 6191,1822 ; 6187,1828 6192,1828 ; 6187,1829 6192,1829 ; 6187,1867 6198,1867 ; 6188,1446 6192,1446 ; 6188,1457 6190,1457 ; 6188,1458 6191,1458 ; 6188,1466 6193,1466 ; 6188,1473 6192,1473 ; 6188,1497 6192,1497 ; 6188,1577 6259,1577 ; 6188,1586 6263,1586 ; 6188,1625 6193,1625 ; 6188,1810 6192,1810 ; 6188,1819 6195,1819 ; 6188,1820 6194,1820 ; 6188,1830 6193,1830 ; 6188,1831 6193,1831 ; 6188,1861 6193,1861 ; 6189,1441 6199,1441 ; 6189,1453 6192,1453 ; 6189,1459 6192,1459 ; 6189,1482 6190,1482 ; 6189,1578 6260,1578 ; 6189,1585 6263,1585 ; 6189,1624 6192,1624 ; 6189,1832 6194,1832 ; 6189,1833 6194,1833 ; 6189,1866 6200,1866 ; 6190,1460 6196,1460 ; 6190,1467 6194,1467 ; 6190,1480 6193,1480 ; 6190,1486 6195,1486 ; 6190,1498 6193,1498 ; 6190,1579 6260,1579 ; 6190,1584 6262,1584 ; 6190,1809 6194,1809 ; 6190,1818 6204,1818 ; 6190,1834 6195,1834 ; 6190,1835 6195,1835 ; 6191,1442 6201,1442 ; 6191,1447 6195,1447 ; 6191,1461 6196,1461 ; 6191,1464 6193,1464 ; 6191,1468 6195,1468 ; 6191,1478 6194,1478 ; 6191,1479 6193,1479 ; 6191,1485 6195,1485 ; 6191,1487 6195,1487 ; 6191,1499 6195,1499 ; 6191,1580 6261,1580 ; 6191,1581 6261,1581 ; 6191,1583 6262,1583 ; 6191,1817 6203,1817 ; 6191,1836 6196,1836 ; 6191,1837 6196,1837 ; 6191,1860 6196,1860 ; 6191,1865 6202,1865 ; 6192,1455 6196,1455 ; 6192,1462 6197,1462 ; 6192,1463 6198,1463 ; 6192,1474 6194,1474 ; 6192,1475 6195,1475 ; 6192,1477 6201,1477 ; 6192,1484 6195,1484 ; 6192,1582 6262,1582 ; 6192,1808 6196,1808 ; 6192,1838 6197,1838 ; 6193,1443 6203,1443 ; 6193,1448 6197,1448 ; 6193,1469 6195,1469 ; 6193,1476 6201,1476 ; 6193,1482 6194,1482 ; 6193,1483 6194,1483 ; 6193,1500 6197,1500 ; 6193,1816 6202,1816 ; 6193,1839 6197,1839 ; 6193,1840 6198,1840 ; 6193,1859 6198,1859 ; 6194,1456 6197,1456 ; 6194,1457 6197,1457 ; 6194,1459 6197,1459 ; 6194,1723 6263,1723 ; 6194,1807 6197,1807 ; 6194,1841 6199,1841 ; 6194,1842 6199,1842 ; 6194,1864 6204,1864 ; 6195,1449 6199,1449 ; 6195,1458 6197,1458 ; 6195,1501 6198,1501 ; 6195,1722 6263,1722 ; 6195,1806 6199,1806 ; 6195,1843 6198,1843 ; 6196,1444 6205,1444 ; 6196,1464 6198,1464 ; 6196,1502 6200,1502 ; 6196,1721 6264,1721 ; 6196,1858 6200,1858 ; 6196,1863 6206,1863 ; 6197,1445 6208,1445 ; 6197,1450 6201,1450 ; 6197,1474 6199,1474 ; 6197,1475 6200,1475 ; 6197,1478 6201,1478 ; 6197,1720 6264,1720 ; 6197,1805 6200,1805 ; 6197,1815 6198,1815 ; 6197,1857 6202,1857 ; 6198,1479 6201,1479 ; 6198,1503 6201,1503 ; 6198,1719 6264,1719 ; 6198,1804 6202,1804 ; 6198,1819 6204,1819 ; 6198,1862 6208,1862 ; 6199,1451 6203,1451 ; 6199,1504 6203,1504 ; 6199,1718 6265,1718 ; 6199,1820 6205,1820 ; 6200,1446 6209,1446 ; 6200,1717 6265,1717 ; 6200,1803 6203,1803 ; 6200,1821 6206,1821 ; 6200,1856 6204,1856 ; 6200,1861 6210,1861 ; 6201,1447 6211,1447 ; 6201,1505 6204,1505 ; 6201,1715 6266,1715 ; 6201,1716 6265,1716 ; 6201,1802 6205,1802 ; 6201,1822 6206,1822 ; 6202,1452 6205,1452 ; 6202,1506 6206,1506 ; 6202,1823 6207,1823 ; 6202,1824 6208,1824 ; 6202,1855 6206,1855 ; 6203,1453 6207,1453 ; 6203,1591 6265,1591 ; 6203,1714 6266,1714 ; 6203,1801 6206,1801 ; 6203,1825 6208,1825 ; 6203,1826 6208,1826 ; 6203,1860 6212,1860 ; 6204,1448 6213,1448 ; 6204,1507 6207,1507 ; 6204,1592 6266,1592 ; 6204,1713 6267,1713 ; 6204,1800 6208,1800 ; 6204,1827 6209,1827 ; 6204,1854 6208,1854 ; 6204,1859 6214,1859 ; 6205,1449 6215,1449 ; 6205,1454 6209,1454 ; 6205,1508 6212,1508 ; 6205,1593 6266,1593 ; 6205,1712 6267,1712 ; 6205,1828 6210,1828 ; 6205,1829 6210,1829 ; 6206,1594 6266,1594 ; 6206,1711 6267,1711 ; 6206,1799 6209,1799 ; 6206,1830 6211,1830 ; 6206,1831 6211,1831 ; 6206,1853 6209,1853 ; 6206,1858 6216,1858 ; 6207,1455 6211,1455 ; 6207,1509 6211,1509 ; 6207,1595 6267,1595 ; 6207,1710 6268,1710 ; 6207,1798 6210,1798 ; 6207,1832 6212,1832 ; 6207,1833 6212,1833 ; 6208,1450 6217,1450 ; 6208,1507 6213,1507 ; 6208,1510 6211,1510 ; 6208,1596 6267,1596 ; 6208,1709 6268,1709 ; 6208,1834 6213,1834 ; 6208,1835 6212,1835 ; 6208,1852 6211,1852 ; 6208,1857 6217,1857 ; 6209,1451 6218,1451 ; 6209,1456 6213,1456 ; 6209,1506 6213,1506 ; 6209,1597 6267,1597 ; 6209,1708 6268,1708 ; 6209,1797 6212,1797 ; 6209,1836 6211,1836 ; 6209,1851 6213,1851 ; 6210,1505 6214,1505 ; 6210,1511 6212,1511 ; 6210,1598 6268,1598 ; 6210,1707 6269,1707 ; 6210,1796 6213,1796 ; 6210,1856 6219,1856 ; 6211,1452 6220,1452 ; 6211,1457 6214,1457 ; 6211,1504 6215,1504 ; 6211,1512 6214,1512 ; 6211,1599 6268,1599 ; 6211,1706 6269,1706 ; 6211,1795 6214,1795 ; 6211,1850 6215,1850 ; 6212,1502 6216,1502 ; 6212,1503 6215,1503 ; 6212,1513 6219,1513 ; 6212,1600 6268,1600 ; 6212,1705 6269,1705 ; 6212,1794 6215,1794 ; 6212,1805 6216,1805 ; 6212,1806 6217,1806 ; 6212,1855 6221,1855 ; 6213,1453 6222,1453 ; 6213,1458 6216,1458 ; 6213,1501 6217,1501 ; 6213,1514 6218,1514 ; 6213,1601 6269,1601 ; 6213,1704 6269,1704 ; 6213,1804 6216,1804 ; 6213,1807 6218,1807 ; 6213,1849 6217,1849 ; 6213,1854 6223,1854 ; 6214,1459 6218,1459 ; 6214,1499 6219,1499 ; 6214,1500 6218,1500 ; 6214,1602 6269,1602 ; 6214,1703 6270,1703 ; 6214,1793 6217,1793 ; 6214,1803 6215,1803 ; 6214,1808 6219,1808 ; 6214,1809 6220,1809 ; 6215,1454 6224,1454 ; 6215,1498 6219,1498 ; 6215,1515 6218,1515 ; 6215,1603 6269,1603 ; 6215,1702 6270,1702 ; 6215,1792 6218,1792 ; 6215,1810 6221,1810 ; 6215,1848 6218,1848 ; 6216,1460 6219,1460 ; 6216,1497 6220,1497 ; 6216,1512 6220,1512 ; 6216,1516 6219,1516 ; 6216,1604 6270,1604 ; 6216,1701 6270,1701 ; 6216,1791 6219,1791 ; 6216,1811 6221,1811 ; 6216,1847 6220,1847 ; 6216,1853 6224,1853 ; 6217,1455 6225,1455 ; 6217,1496 6221,1496 ; 6217,1510 6222,1510 ; 6217,1511 6221,1511 ; 6217,1517 6220,1517 ; 6217,1605 6270,1605 ; 6217,1700 6271,1700 ; 6217,1790 6220,1790 ; 6217,1812 6222,1812 ; 6217,1852 6226,1852 ; 6218,1456 6227,1456 ; 6218,1461 6221,1461 ; 6218,1494 6222,1494 ; 6218,1495 6222,1495 ; 6218,1509 6222,1509 ; 6218,1518 6226,1518 ; 6218,1606 6270,1606 ; 6218,1699 6271,1699 ; 6218,1813 6223,1813 ; 6218,1846 6222,1846 ; 6219,1462 6223,1462 ; 6219,1493 6223,1493 ; 6219,1508 6223,1508 ; 6219,1519 6225,1519 ; 6219,1607 6271,1607 ; 6219,1698 6271,1698 ; 6219,1789 6221,1789 ; 6219,1814 6224,1814 ; 6219,1815 6230,1815 ; 6219,1851 6227,1851 ; 6220,1457 6228,1457 ; 6220,1491 6224,1491 ; 6220,1492 6224,1492 ; 6220,1507 6224,1507 ; 6220,1520 6225,1520 ; 6220,1608 6271,1608 ; 6220,1697 6271,1697 ; 6220,1788 6222,1788 ; 6220,1816 6230,1816 ; 6220,1845 6223,1845 ; 6220,1850 6229,1850 ; 6221,1463 6224,1463 ; 6221,1490 6225,1490 ; 6221,1505 6226,1505 ; 6221,1506 6225,1506 ; 6221,1609 6271,1609 ; 6221,1696 6272,1696 ; 6221,1787 6224,1787 ; 6221,1817 6230,1817 ; 6221,1844 6225,1844 ; 6222,1458 6230,1458 ; 6222,1464 6226,1464 ; 6222,1489 6226,1489 ; 6222,1521 6225,1521 ; 6222,1610 6271,1610 ; 6222,1695 6272,1695 ; 6222,1786 6225,1786 ; 6222,1818 6230,1818 ; 6222,1849 6230,1849 ; 6223,1459 6232,1459 ; 6223,1487 6227,1487 ; 6223,1488 6227,1488 ; 6223,1503 6228,1503 ; 6223,1504 6227,1504 ; 6223,1517 6227,1517 ; 6223,1522 6225,1522 ; 6223,1611 6272,1611 ; 6223,1694 6272,1694 ; 6223,1785 6226,1785 ; 6223,1796 6230,1796 ; 6223,1797 6231,1797 ; 6223,1819 6230,1819 ; 6223,1820 6231,1820 ; 6223,1843 6226,1843 ; 6224,1465 6227,1465 ; 6224,1486 6228,1486 ; 6224,1502 6228,1502 ; 6224,1516 6228,1516 ; 6224,1523 6226,1523 ; 6224,1612 6272,1612 ; 6224,1693 6272,1693 ; 6224,1784 6227,1784 ; 6224,1795 6229,1795 ; 6224,1798 6231,1798 ; 6224,1799 6232,1799 ; 6224,1800 6233,1800 ; 6224,1801 6234,1801 ; 6224,1802 6235,1802 ; 6224,1803 6228,1803 ; 6224,1821 6231,1821 ; 6224,1848 6232,1848 ; 6225,1460 6233,1460 ; 6225,1485 6229,1485 ; 6225,1501 6229,1501 ; 6225,1515 6229,1515 ; 6225,1524 6233,1524 ; 6225,1613 6272,1613 ; 6225,1692 6273,1692 ; 6225,1783 6228,1783 ; 6225,1794 6228,1794 ; 6225,1804 6228,1804 ; 6225,1805 6228,1805 ; 6225,1806 6229,1806 ; 6225,1807 6229,1807 ; 6225,1808 6229,1808 ; 6225,1809 6229,1809 ; 6225,1810 6229,1810 ; 6225,1811 6229,1811 ; 6225,1822 6231,1822 ; 6225,1842 6228,1842 ; 6225,1847 6233,1847 ; 6226,1461 6234,1461 ; 6226,1466 6229,1466 ; 6226,1483 6230,1483 ; 6226,1484 6230,1484 ; 6226,1500 6230,1500 ; 6226,1514 6230,1514 ; 6226,1525 6232,1525 ; 6226,1614 6272,1614 ; 6226,1691 6273,1691 ; 6226,1782 6229,1782 ; 6226,1793 6227,1793 ; 6226,1812 6229,1812 ; 6226,1813 6230,1813 ; 6226,1814 6230,1814 ; 6226,1823 6230,1823 ; 6226,1841 6229,1841 ; 6227,1467 6230,1467 ; 6227,1482 6231,1482 ; 6227,1498 6232,1498 ; 6227,1499 6231,1499 ; 6227,1513 6231,1513 ; 6227,1526 6231,1526 ; 6227,1615 6273,1615 ; 6227,1690 6273,1690 ; 6227,1781 6230,1781 ; 6227,1824 6229,1824 ; 6227,1840 6231,1840 ; 6227,1846 6235,1846 ; 6228,1462 6236,1462 ; 6228,1481 6232,1481 ; 6228,1497 6233,1497 ; 6228,1512 6232,1512 ; 6228,1527 6231,1527 ; 6228,1616 6273,1616 ; 6228,1689 6273,1689 ; 6228,1780 6231,1780 ; 6228,1845 6236,1845 ; 6229,1463 6237,1463 ; 6229,1468 6232,1468 ; 6229,1479 6233,1479 ; 6229,1480 6233,1480 ; 6229,1496 6233,1496 ; 6229,1511 6233,1511 ; 6229,1528 6231,1528 ; 6229,1617 6273,1617 ; 6229,1688 6273,1688 ; 6229,1779 6232,1779 ; 6229,1839 6232,1839 ; 6230,1469 6233,1469 ; 6230,1478 6234,1478 ; 6230,1495 6234,1495 ; 6230,1510 6234,1510 ; 6230,1523 6235,1523 ; 6230,1529 6232,1529 ; 6230,1618 6273,1618 ; 6230,1686 6274,1686 ; 6230,1687 6274,1687 ; 6230,1778 6233,1778 ; 6230,1803 6235,1803 ; 6230,1838 6234,1838 ; 6230,1844 6238,1844 ; 6231,1464 6239,1464 ; 6231,1477 6235,1477 ; 6231,1494 6235,1494 ; 6231,1508 6236,1508 ; 6231,1509 6235,1509 ; 6231,1522 6236,1522 ; 6231,1530 6233,1530 ; 6231,1619 6273,1619 ; 6231,1777 6234,1777 ; 6231,1804 6236,1804 ; 6231,1843 6239,1843 ; 6232,1465 6240,1465 ; 6232,1470 6234,1470 ; 6232,1475 6236,1475 ; 6232,1476 6236,1476 ; 6232,1492 6237,1492 ; 6232,1493 6236,1493 ; 6232,1507 6237,1507 ; 6232,1521 6237,1521 ; 6232,1531 6239,1531 ; 6232,1620 6274,1620 ; 6232,1685 6274,1685 ; 6232,1776 6235,1776 ; 6232,1805 6237,1805 ; 6232,1837 6235,1837 ; 6233,1471 6236,1471 ; 6233,1474 6240,1474 ; 6233,1491 6237,1491 ; 6233,1506 6238,1506 ; 6233,1520 6238,1520 ; 6233,1532 6238,1532 ; 6233,1621 6274,1621 ; 6233,1684 6274,1684 ; 6233,1775 6236,1775 ; 6233,1806 6238,1806 ; 6233,1807 6239,1807 ; 6233,1836 6236,1836 ; 6233,1842 6240,1842 ; 6234,1466 6241,1466 ; 6234,1472 6237,1472 ; 6234,1473 6239,1473 ; 6234,1490 6238,1490 ; 6234,1505 6239,1505 ; 6234,1519 6239,1519 ; 6234,1533 6237,1533 ; 6234,1622 6274,1622 ; 6234,1683 6274,1683 ; 6234,1774 6236,1774 ; 6234,1808 6239,1808 ; 6234,1841 6242,1841 ; 6235,1467 6243,1467 ; 6235,1489 6239,1489 ; 6235,1504 6240,1504 ; 6235,1518 6240,1518 ; 6235,1534 6237,1534 ; 6235,1535 6238,1535 ; 6235,1623 6274,1623 ; 6235,1682 6275,1682 ; 6235,1773 6237,1773 ; 6235,1809 6240,1809 ; 6235,1835 6238,1835 ; 6236,1488 6240,1488 ; 6236,1503 6241,1503 ; 6236,1517 6241,1517 ; 6236,1530 6241,1530 ; 6236,1536 6239,1536 ; 6236,1624 6274,1624 ; 6236,1681 6275,1681 ; 6236,1771 6239,1771 ; 6236,1772 6238,1772 ; 6236,1783 6242,1783 ; 6236,1784 6243,1784 ; 6236,1810 6241,1810 ; 6236,1834 6239,1834 ; 6236,1840 6243,1840 ; 6237,1468 6244,1468 ; 6237,1487 6241,1487 ; 6237,1502 6242,1502 ; 6237,1516 6242,1516 ; 6237,1529 6242,1529 ; 6237,1537 6240,1537 ; 6237,1625 6274,1625 ; 6237,1680 6275,1680 ; 6237,1770 6240,1770 ; 6237,1782 6240,1782 ; 6237,1785 6244,1785 ; 6237,1811 6242,1811 ; 6237,1812 6243,1812 ; 6237,1833 6240,1833 ; 6237,1839 6244,1839 ; 6238,1469 6245,1469 ; 6238,1475 6241,1475 ; 6238,1485 6243,1485 ; 6238,1486 6242,1486 ; 6238,1501 6243,1501 ; 6238,1515 6243,1515 ; 6238,1528 6243,1528 ; 6238,1538 6245,1538 ; 6238,1626 6275,1626 ; 6238,1679 6275,1679 ; 6238,1769 6241,1769 ; 6238,1781 6239,1781 ; 6238,1786 6245,1786 ; 6238,1813 6242,1813 ; 6238,1832 6242,1832 ; 6238,1838 6246,1838 ; 6239,1470 6247,1470 ; 6239,1484 6243,1484 ; 6239,1500 6244,1500 ; 6239,1514 6244,1514 ; 6239,1527 6244,1527 ; 6239,1539 6244,1539 ; 6239,1627 6275,1627 ; 6239,1678 6275,1678 ; 6239,1768 6242,1768 ; 6239,1787 6246,1787 ; 6239,1814 6241,1814 ; 6240,1476 6242,1476 ; 6240,1483 6244,1483 ; 6240,1499 6244,1499 ; 6240,1526 6245,1526 ; 6240,1540 6243,1540 ; 6240,1541 6243,1541 ; 6240,1628 6275,1628 ; 6240,1677 6275,1677 ; 6240,1767 6242,1767 ; 6240,1788 6247,1788 ; 6240,1831 6243,1831 ; 6240,1837 6247,1837 ; 6241,1471 6248,1471 ; 6241,1477 6244,1477 ; 6241,1482 6245,1482 ; 6241,1498 6246,1498 ; 6241,1513 6245,1513 ; 6241,1525 6247,1525 ; 6241,1537 6247,1537 ; 6241,1542 6244,1542 ; 6241,1629 6275,1629 ; 6241,1676 6275,1676 ; 6241,1766 6243,1766 ; 6241,1789 6248,1789 ; 6241,1830 6244,1830 ; 6241,1836 6248,1836 ; 6242,1472 6249,1472 ; 6242,1478 6245,1478 ; 6242,1481 6249,1481 ; 6242,1497 6246,1497 ; 6242,1512 6246,1512 ; 6242,1543 6244,1543 ; 6242,1630 6275,1630 ; 6242,1675 6276,1675 ; 6242,1764 6245,1764 ; 6242,1765 6244,1765 ; 6242,1790 6249,1790 ; 6242,1829 6245,1829 ; 6242,1835 6249,1835 ; 6243,1473 6250,1473 ; 6243,1479 6246,1479 ; 6243,1480 6247,1480 ; 6243,1496 6247,1496 ; 6243,1511 6247,1511 ; 6243,1524 6248,1524 ; 6243,1536 6248,1536 ; 6243,1544 6253,1544 ; 6243,1631 6275,1631 ; 6243,1673 6276,1673 ; 6243,1674 6276,1674 ; 6243,1763 6246,1763 ; 6243,1791 6250,1791 ; 6243,1834 6251,1834 ; 6244,1474 6251,1474 ; 6244,1495 6248,1495 ; 6244,1510 6249,1510 ; 6244,1523 6249,1523 ; 6244,1535 6249,1535 ; 6244,1545 6251,1545 ; 6244,1632 6276,1632 ; 6244,1672 6276,1672 ; 6244,1762 6246,1762 ; 6244,1792 6251,1792 ; 6244,1828 6246,1828 ; 6245,1494 6249,1494 ; 6245,1509 6250,1509 ; 6245,1522 6250,1522 ; 6245,1534 6251,1534 ; 6245,1546 6249,1546 ; 6245,1547 6248,1547 ; 6245,1633 6276,1633 ; 6245,1671 6276,1671 ; 6245,1760 6248,1760 ; 6245,1761 6247,1761 ; 6245,1793 6252,1793 ; 6245,1827 6248,1827 ; 6245,1833 6252,1833 ; 6246,1475 6253,1475 ; 6246,1493 6250,1493 ; 6246,1508 6251,1508 ; 6246,1521 6252,1521 ; 6246,1548 6248,1548 ; 6246,1634 6276,1634 ; 6246,1670 6276,1670 ; 6246,1759 6248,1759 ; 6246,1826 6249,1826 ; 6246,1832 6253,1832 ; 6247,1476 6254,1476 ; 6247,1482 6250,1482 ; 6247,1492 6251,1492 ; 6247,1507 6252,1507 ; 6247,1533 6252,1533 ; 6247,1549 6249,1549 ; 6247,1550 6250,1550 ; 6247,1635 6276,1635 ; 6247,1668 6276,1668 ; 6247,1669 6276,1669 ; 6247,1758 6249,1758 ; 6247,1794 6253,1794 ; 6247,1825 6250,1825 ; 6247,1831 6254,1831 ; 6248,1477 6255,1477 ; 6248,1483 6251,1483 ; 6248,1491 6252,1491 ; 6248,1506 6253,1506 ; 6248,1520 6253,1520 ; 6248,1532 6254,1532 ; 6248,1543 6254,1543 ; 6248,1551 6250,1551 ; 6248,1636 6276,1636 ; 6248,1666 6276,1666 ; 6248,1667 6276,1667 ; 6248,1756 6251,1756 ; 6248,1757 6250,1757 ; 6248,1795 6254,1795 ; 6248,1824 6251,1824 ; 6249,1478 6256,1478 ; 6249,1484 6252,1484 ; 6249,1490 6253,1490 ; 6249,1505 6254,1505 ; 6249,1519 6254,1519 ; 6249,1552 6257,1552 ; 6249,1637 6276,1637 ; 6249,1665 6276,1665 ; 6249,1755 6251,1755 ; 6249,1796 6255,1796 ; 6249,1823 6252,1823 ; 6249,1830 6255,1830 ; 6250,1479 6257,1479 ; 6250,1485 6253,1485 ; 6250,1489 6257,1489 ; 6250,1504 6255,1504 ; 6250,1518 6255,1518 ; 6250,1531 6255,1531 ; 6250,1542 6256,1542 ; 6250,1553 6255,1553 ; 6250,1554 6254,1554 ; 6250,1638 6276,1638 ; 6250,1663 6277,1663 ; 6250,1664 6276,1664 ; 6250,1753 6253,1753 ; 6250,1754 6252,1754 ; 6250,1797 6256,1797 ; 6250,1829 6257,1829 ; 6251,1486 6254,1486 ; 6251,1488 6256,1488 ; 6251,1503 6256,1503 ; 6251,1517 6256,1517 ; 6251,1530 6257,1530 ; 6251,1541 6257,1541 ; 6251,1555 6253,1555 ; 6251,1556 6254,1556 ; 6251,1639 6276,1639 ; 6251,1640 6276,1640 ; 6251,1661 6277,1661 ; 6251,1662 6277,1662 ; 6251,1752 6253,1752 ; 6251,1765 6263,1765 ; 6251,1766 6266,1766 ; 6251,1767 6270,1767 ; 6251,1798 6257,1798 ; 6251,1822 6254,1822 ; 6251,1828 6258,1828 ; 6252,1480 6258,1480 ; 6252,1487 6255,1487 ; 6252,1502 6257,1502 ; 6252,1516 6258,1516 ; 6252,1529 6258,1529 ; 6252,1551 6259,1551 ; 6252,1557 6254,1557 ; 6252,1641 6276,1641 ; 6252,1659 6277,1659 ; 6252,1660 6277,1660 ; 6252,1750 6255,1750 ; 6252,1751 6254,1751 ; 6252,1764 6260,1764 ; 6252,1768 6258,1768 ; 6252,1799 6256,1799 ; 6252,1821 6255,1821 ; 6252,1827 6259,1827 ; 6253,1481 6259,1481 ; 6253,1501 6258,1501 ; 6253,1540 6259,1540 ; 6253,1558 6255,1558 ; 6253,1559 6264,1559 ; 6253,1642 6276,1642 ; 6253,1643 6276,1643 ; 6253,1656 6277,1656 ; 6253,1657 6277,1657 ; 6253,1658 6277,1658 ; 6253,1749 6255,1749 ; 6253,1763 6256,1763 ; 6253,1769 6258,1769 ; 6253,1770 6258,1770 ; 6253,1800 6256,1800 ; 6253,1820 6256,1820 ; 6253,1826 6260,1826 ; 6254,1482 6260,1482 ; 6254,1515 6259,1515 ; 6254,1528 6259,1528 ; 6254,1550 6261,1550 ; 6254,1560 6262,1560 ; 6254,1644 6276,1644 ; 6254,1645 6276,1645 ; 6254,1646 6277,1646 ; 6254,1647 6277,1647 ; 6254,1648 6277,1648 ; 6254,1649 6277,1649 ; 6254,1650 6277,1650 ; 6254,1651 6277,1651 ; 6254,1652 6277,1652 ; 6254,1653 6277,1653 ; 6254,1654 6277,1654 ; 6254,1655 6277,1655 ; 6254,1747 6256,1747 ; 6254,1748 6256,1748 ; 6254,1771 6259,1771 ; 6254,1819 6257,1819 ; 6254,1825 6261,1825 ; 6255,1483 6262,1483 ; 6255,1500 6259,1500 ; 6255,1514 6260,1514 ; 6255,1527 6260,1527 ; 6255,1539 6261,1539 ; 6255,1561 6259,1561 ; 6255,1562 6258,1562 ; 6255,1745 6258,1745 ; 6255,1746 6257,1746 ; 6255,1772 6260,1772 ; 6255,1773 6260,1773 ; 6255,1818 6258,1818 ; 6255,1824 6262,1824 ; 6256,1484 6263,1484 ; 6256,1490 6259,1490 ; 6256,1499 6260,1499 ; 6256,1513 6261,1513 ; 6256,1526 6262,1526 ; 6256,1538 6262,1538 ; 6256,1549 6262,1549 ; 6256,1563 6258,1563 ; 6256,1564 6259,1564 ; 6256,1744 6258,1744 ; 6256,1774 6261,1774 ; 6256,1817 6259,1817 ; 6256,1823 6263,1823 ; 6257,1485 6264,1485 ; 6257,1491 6260,1491 ; 6257,1498 6261,1498 ; 6257,1512 6263,1512 ; 6257,1565 6259,1565 ; 6257,1566 6269,1566 ; 6257,1742 6259,1742 ; 6257,1743 6259,1743 ; 6257,1775 6262,1775 ; 6257,1776 6262,1776 ; 6257,1816 6260,1816 ; 6258,1486 6265,1486 ; 6258,1492 6261,1492 ; 6258,1497 6265,1497 ; 6258,1525 6263,1525 ; 6258,1537 6264,1537 ; 6258,1548 6265,1548 ; 6258,1567 6267,1567 ; 6258,1740 6260,1740 ; 6258,1741 6260,1741 ; 6258,1777 6263,1777 ; 6258,1815 6261,1815 ; 6258,1822 6264,1822 ; 6259,1487 6266,1487 ; 6259,1493 6261,1493 ; 6259,1496 6264,1496 ; 6259,1511 6264,1511 ; 6259,1524 6265,1524 ; 6259,1558 6266,1558 ; 6259,1568 6265,1568 ; 6259,1569 6262,1569 ; 6259,1738 6262,1738 ; 6259,1739 6261,1739 ; 6259,1778 6264,1778 ; 6259,1779 6265,1779 ; 6259,1814 6262,1814 ; 6259,1821 6265,1821 ; 6260,1488 6267,1488 ; 6260,1494 6263,1494 ; 6260,1495 6264,1495 ; 6260,1510 6265,1510 ; 6260,1536 6265,1536 ; 6260,1547 6266,1547 ; 6260,1570 6262,1570 ; 6260,1571 6262,1571 ; 6260,1736 6263,1736 ; 6260,1737 6262,1737 ; 6260,1768 6273,1768 ; 6260,1780 6265,1780 ; 6260,1813 6263,1813 ; 6260,1820 6266,1820 ; 6261,1489 6268,1489 ; 6261,1509 6266,1509 ; 6261,1523 6266,1523 ; 6261,1535 6267,1535 ; 6261,1546 6268,1546 ; 6261,1557 6268,1557 ; 6261,1572 6263,1572 ; 6261,1573 6263,1573 ; 6261,1734 6264,1734 ; 6261,1735 6263,1735 ; 6261,1781 6266,1781 ; 6261,1782 6267,1782 ; 6261,1812 6264,1812 ; 6261,1819 6267,1819 ; 6262,1508 6268,1508 ; 6262,1522 6267,1522 ; 6262,1574 6264,1574 ; 6262,1575 6264,1575 ; 6262,1732 6265,1732 ; 6262,1733 6264,1733 ; 6262,1783 6267,1783 ; 6262,1811 6265,1811 ; 6262,1818 6268,1818 ; 6263,1490 6269,1490 ; 6263,1491 6270,1491 ; 6263,1521 6269,1521 ; 6263,1534 6269,1534 ; 6263,1545 6270,1545 ; 6263,1556 6270,1556 ; 6263,1576 6265,1576 ; 6263,1577 6265,1577 ; 6263,1730 6266,1730 ; 6263,1731 6265,1731 ; 6263,1769 6277,1769 ; 6263,1784 6268,1784 ; 6263,1785 6268,1785 ; 6263,1810 6266,1810 ; 6263,1817 6269,1817 ; 6264,1492 6271,1492 ; 6264,1498 6266,1498 ; 6264,1507 6269,1507 ; 6264,1533 6270,1533 ; 6264,1565 6272,1565 ; 6264,1578 6266,1578 ; 6264,1579 6266,1579 ; 6264,1728 6266,1728 ; 6264,1729 6266,1729 ; 6264,1746 6274,1746 ; 6264,1786 6268,1786 ; 6264,1809 6267,1809 ; 6264,1816 6270,1816 ; 6265,1493 6272,1493 ; 6265,1499 6267,1499 ; 6265,1506 6270,1506 ; 6265,1520 6270,1520 ; 6265,1544 6272,1544 ; 6265,1555 6272,1555 ; 6265,1580 6267,1580 ; 6265,1581 6267,1581 ; 6265,1726 6267,1726 ; 6265,1727 6267,1727 ; 6265,1744 6270,1744 ; 6265,1745 6271,1745 ; 6265,1747 6275,1747 ; 6265,1787 6267,1787 ; 6265,1788 6266,1788 ; 6265,1808 6268,1808 ; 6265,1815 6271,1815 ; 6266,1494 6273,1494 ; 6266,1500 6268,1500 ; 6266,1505 6273,1505 ; 6266,1519 6272,1519 ; 6266,1532 6272,1532 ; 6266,1564 6274,1564 ; 6266,1582 6268,1582 ; 6266,1583 6268,1583 ; 6266,1584 6268,1584 ; 6266,1723 6269,1723 ; 6266,1724 6268,1724 ; 6266,1725 6268,1725 ; 6266,1742 6270,1742 ; 6266,1743 6270,1743 ; 6266,1770 6279,1770 ; 6266,1807 6269,1807 ; 6266,1814 6272,1814 ; 6267,1495 6274,1495 ; 6267,1501 6269,1501 ; 6267,1504 6272,1504 ; 6267,1531 6273,1531 ; 6267,1543 6273,1543 ; 6267,1554 6274,1554 ; 6267,1585 6269,1585 ; 6267,1586 6269,1586 ; 6267,1721 6269,1721 ; 6267,1722 6269,1722 ; 6267,1740 6271,1740 ; 6267,1741 6271,1741 ; 6267,1748 6280,1748 ; 6267,1806 6270,1806 ; 6267,1813 6273,1813 ; 6268,1496 6274,1496 ; 6268,1502 6270,1502 ; 6268,1503 6271,1503 ; 6268,1518 6273,1518 ; 6268,1563 6276,1563 ; 6268,1587 6270,1587 ; 6268,1588 6270,1588 ; 6268,1589 6270,1589 ; 6268,1718 6271,1718 ; 6268,1719 6270,1719 ; 6268,1720 6270,1720 ; 6268,1738 6272,1738 ; 6268,1739 6272,1739 ; 6268,1805 6271,1805 ; 6268,1812 6274,1812 ; 6269,1497 6276,1497 ; 6269,1517 6275,1517 ; 6269,1530 6275,1530 ; 6269,1542 6275,1542 ; 6269,1553 6276,1553 ; 6269,1590 6271,1590 ; 6269,1591 6271,1591 ; 6269,1716 6271,1716 ; 6269,1717 6271,1717 ; 6269,1736 6273,1736 ; 6269,1737 6273,1737 ; 6269,1771 6279,1771 ; 6269,1804 6271,1804 ; 6269,1811 6275,1811 ; 6270,1498 6276,1498 ; 6270,1516 6276,1516 ; 6270,1541 6277,1541 ; 6270,1592 6272,1592 ; 6270,1593 6272,1593 ; 6270,1594 6272,1594 ; 6270,1713 6272,1713 ; 6270,1714 6272,1714 ; 6270,1715 6272,1715 ; 6270,1734 6274,1734 ; 6270,1735 6274,1735 ; 6270,1749 6280,1749 ; 6270,1803 6272,1803 ; 6270,1809 6277,1809 ; 6270,1810 6276,1810 ; 6271,1499 6277,1499 ; 6271,1506 6274,1506 ; 6271,1529 6276,1529 ; 6271,1552 6278,1552 ; 6271,1562 6279,1562 ; 6271,1595 6273,1595 ; 6271,1596 6273,1596 ; 6271,1597 6273,1597 ; 6271,1710 6273,1710 ; 6271,1711 6273,1711 ; 6271,1712 6273,1712 ; 6271,1732 6275,1732 ; 6271,1733 6275,1733 ; 6271,1750 6281,1750 ; 6271,1801 6274,1801 ; 6271,1802 6273,1802 ; 6271,1808 6277,1808 ; 6272,1500 6278,1500 ; 6272,1507 6275,1507 ; 6272,1515 6277,1515 ; 6272,1528 6278,1528 ; 6272,1540 6279,1540 ; 6272,1598 6273,1598 ; 6272,1599 6274,1599 ; 6272,1600 6274,1600 ; 6272,1707 6274,1707 ; 6272,1708 6274,1708 ; 6272,1709 6274,1709 ; 6272,1730 6275,1730 ; 6272,1731 6276,1731 ; 6272,1772 6278,1772 ; 6272,1800 6275,1800 ; 6272,1807 6278,1807 ; 6273,1501 6279,1501 ; 6273,1508 6275,1508 ; 6273,1514 6280,1514 ; 6273,1551 6280,1551